# Altium PCB SD171-6.0PCB4.PcbDoc (part 10 of 11)
Units mil, origin at the board's own origin, x right, y up, seen from the top; angles counter-clockwise.
Board outline 5995 x 3921.26 mil, 6 copper layers (Top Layer, GND, Mid-Layer 1, Mid-Layer 2, VCC, Bottom Layer); 477 components, 539 nets, 2143 pads, 1050 vias.
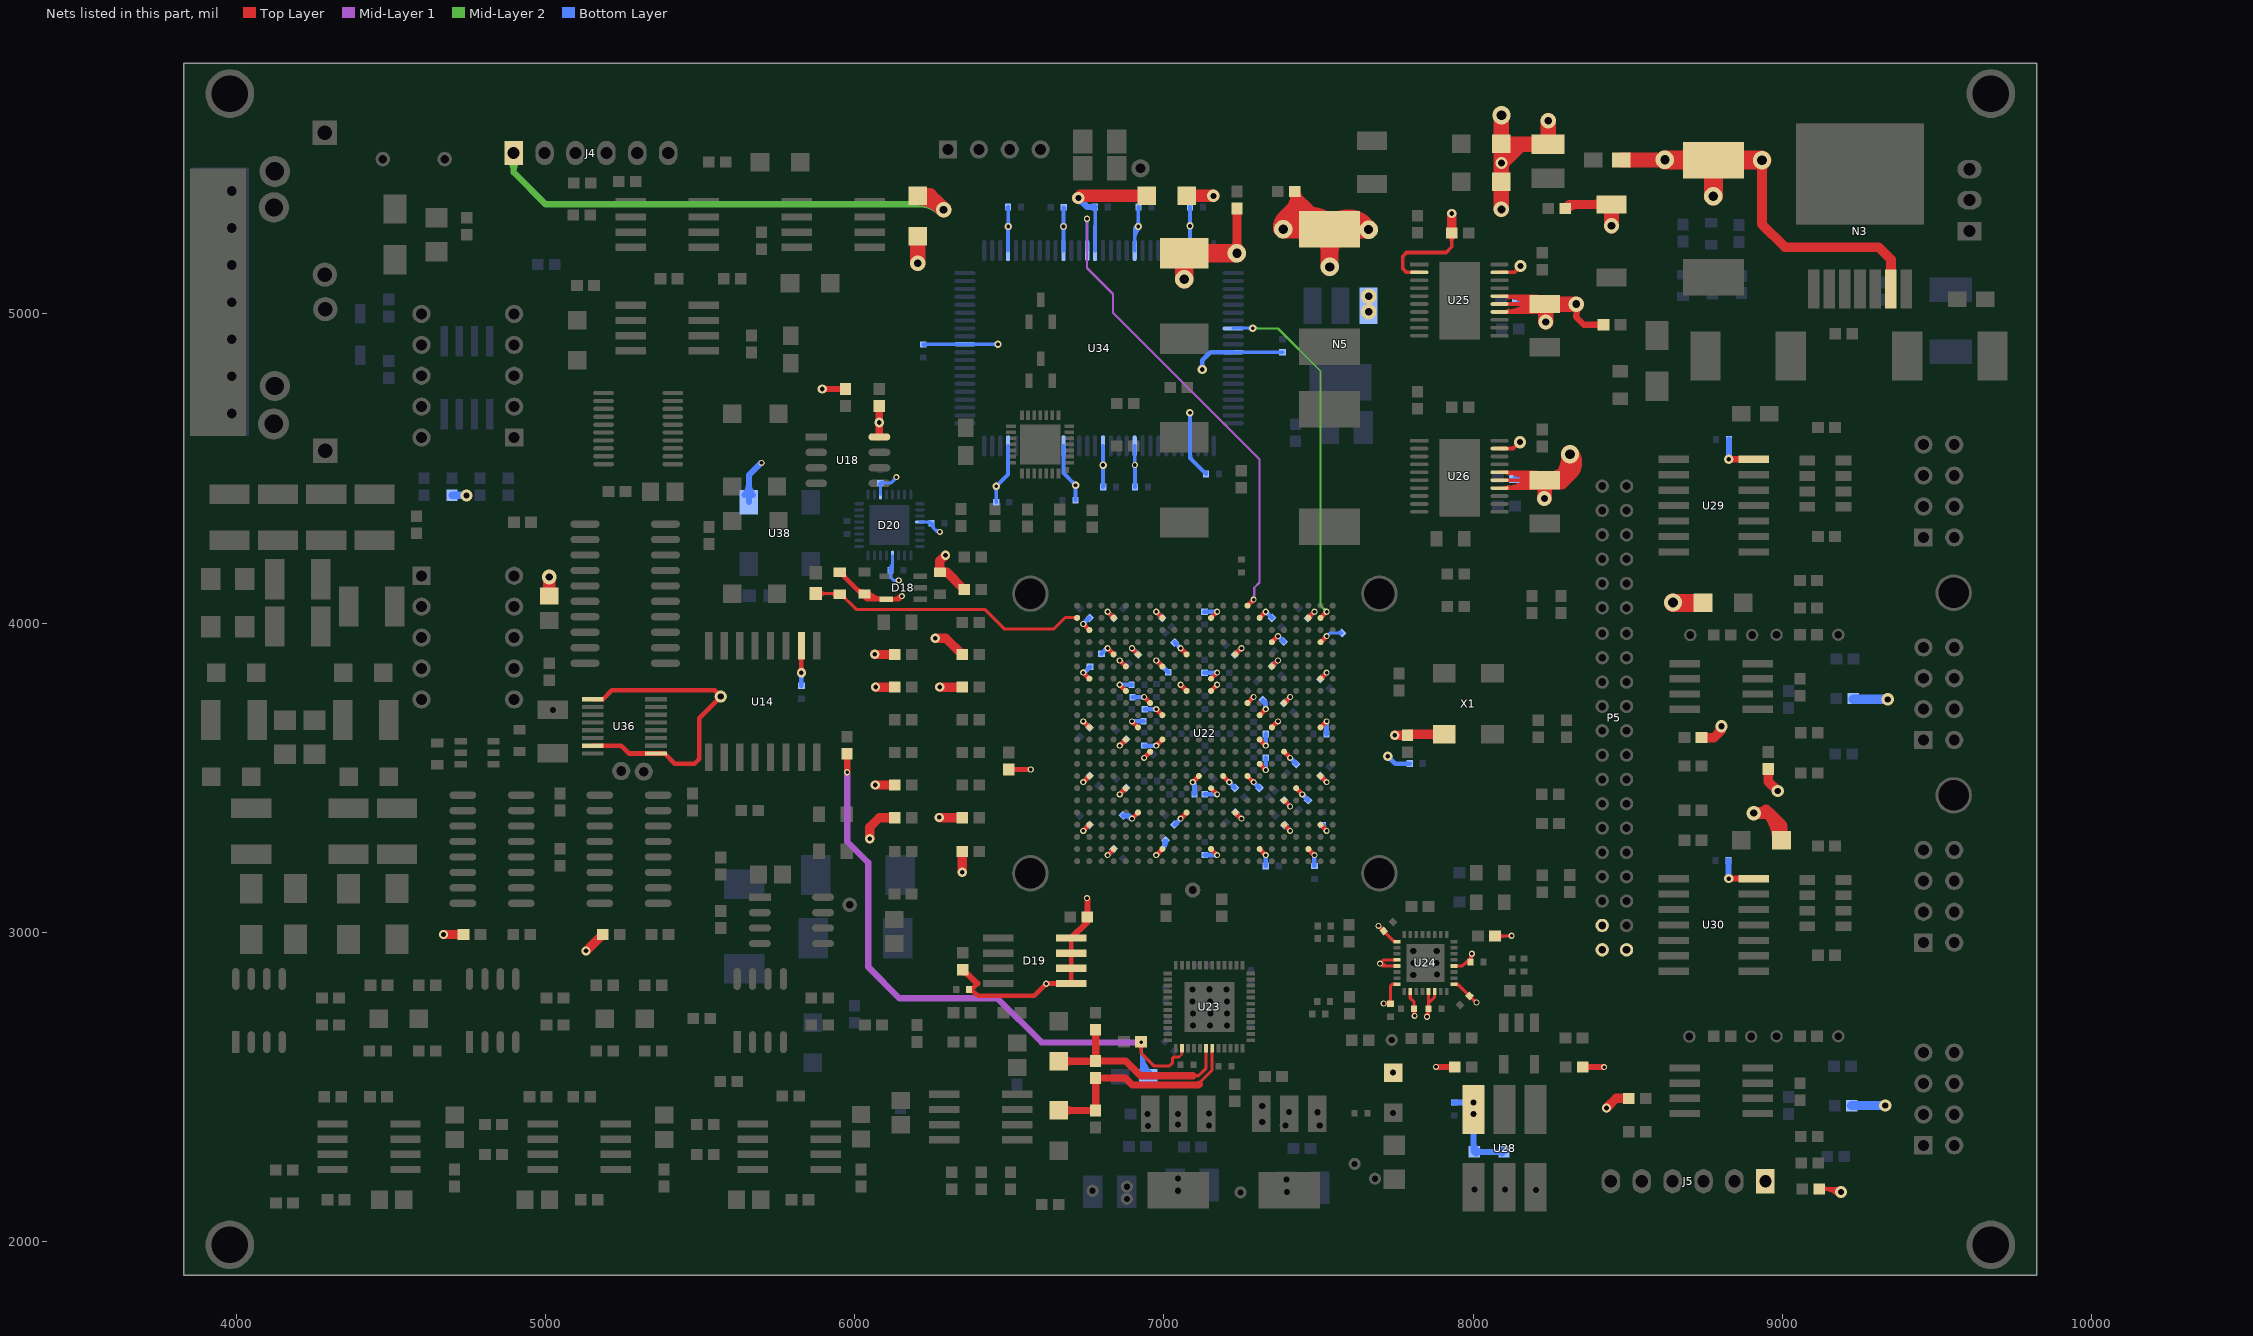
[diagram p14: the nets of this part, all layers, seen from the top]

## Via types
v1: diameter 19.68, hole 11.81, Top Layer to Bottom Layer, 521 vias
v2: diameter 50, hole 25, Top Layer to Bottom Layer, 162 vias
v3: diameter 30, hole 15, Top Layer to Bottom Layer, 100 vias
v4: diameter 39.37, hole 19.68, Top Layer to Bottom Layer, 74 vias
v5: diameter 31.5, hole 15.75, Top Layer to Bottom Layer, 44 vias
v6: diameter 40, hole 20, Top Layer to Bottom Layer, 38 vias
v7: diameter 24, hole 12, Top Layer to Bottom Layer, 33 vias
v8: diameter 47.24, hole 23.62, Top Layer to Bottom Layer, 24 vias
v9: diameter 59.06, hole 31.5, Top Layer to Bottom Layer, 10 vias
v10: diameter 60, hole 30, Top Layer to Bottom Layer, 9 vias
v11: diameter 25.98, hole 12.99, Top Layer to Bottom Layer, tented top, 9 vias
v12: diameter 23.62, hole 11.81, Top Layer to Bottom Layer, 8 vias
v13: diameter 20, hole 12, Top Layer to Bottom Layer, 6 vias
v14: diameter 50, hole 27.56, Top Layer to Bottom Layer, 4 vias
v15: diameter 51.18, hole 27.56, Top Layer to Bottom Layer, 2 vias
v16: diameter 39.37, hole 23.62, Top Layer to Bottom Layer, 2 vias
v17: diameter 80, hole 40, Top Layer to Bottom Layer, 1 vias
v18: diameter 47.24, hole 19.68, Top Layer to Bottom Layer, 1 vias
v19: diameter 47.24, hole 27.56, Top Layer to Bottom Layer, 1 vias
v20: diameter 22.05, hole 11.81, Top Layer to Bottom Layer, 1 vias

## Nets (pads, with @x,y where several pads share a name; then routed paths per layer and width w, separated by ;. In a path a pad name is that pad's centre, name@x,y a point inside that pad or via, vN(x,y) a via of type N, cw(c..) or ccw(c..) an arc to the next point about the centre after c; other vN are vias at no path point) (continued)
VCC3V3: C43.1 C54.1 C58.1 C65.2 C74.1 C110.2 C121.2 C122.2 C123.2 C124.2 C125.2 C126.2 C128.2 C129.2 C130.2 C131.2 C132.2 C133.2 C134.2 C135.2 C136.2 C139.2 C140.2 C141.2 C143.2 C144.2 C147.2 C148.2 C155.2 C160.2 C161.2 C162.2 C168.2 C169.2 C170.2 C176.2 C177.2 C180.2 C181.2 C182.2 C183.2 C184.2 C185.2 C186.2 C187.2 C188.2 C189.2 C190.2 C191.2 C192.2 C193.2 C194.2 C195.2 C196.2 C197.2 C198.2 C199.2 C200.2 C204.2 C205.2 C206.2 C207.2 C208.2 C209.2 C210.2 C211.2 C215.1 C216.2 C223.2 C224.2 C225.2 C226.2 D18.5 D19.5 D19.6 D19.7 D19.8 D20.4 D20.12 D20.27 J4.1 J5.1 L10.2 L22.2 L26.2 L27.1 L29.2 L33.1 L34.1 N5.3 P5.1 P5.2 P5.3 pad.0@5566,3762 pad.0@7741,2545 pad.0@8001,2412 pad.0@8001,2449 R23.1 R33.1 R44.2 R47.2 R48.2 R51.2 R55.2 R60.2 R67.1 R68.2 R70.1 R71.1 R92.1 R102.2 R103.2 R105.2 R107.2 R108.2 R117.2 R127.1 R130.1 R136.2 R137.1 R138.1 R143.1 R149.2 R150.2 U14.2 U18.8 U22.AA3 U22.AA7 U22.AA11 U22.AA15 U22.AA19 U22.B4 U22.B7 U22.B11 U22.B15 U22.B19 U22.C2 U22.C21 U22.D16 U22.E9 U22.E13 U22.E17 U22.E19 U22.F4 U22.F6 U22.F11 U22.G2 U22.G10 U22.G12 U22.G14 U22.G21 U22.H9 U22.H15 U22.J5 U22.J18 U22.K15 U22.L2 U22.L7 U22.L8 U22.L16 U22.L21 U22.M15 U22.N5 U22.N8 U22.N18 U22.R2 U22.R6 U22.R10 U22.R12 U22.R21 U22.T9 U22.T13 U22.U5 U22.U11 U22.U18 U22.V6 U22.V8 U22.V12 U22.V16 U22.W2 U22.W5 U22.W21 U24.1 U24.4 U24.17 U24.20 U24.21 U24.24 U24.26 U24.29 U24.30 U25.2 U28.6 U29.14 U30.14 U36.1 U36.7 U36.9 U38.4 X1.4 | length 18306.8
  Top Layer w10: v1@7694,3015.16 cw(c7694,3003.47) 7702.27,3011.73 cw(c7710.53,3020) v1@7698.84,3020 ; v1(7694,3020) C206.2@7711.15,3002.9 ; v1@7698,2898 v1(7699,2898) ; 7701.82,3012.18 ccw(c7710.44,3020.79) C206.2@7710.44,3008.61 ; 7701.94,3012.06 cw(c7693.48,3003.61) C206.2@7705.44,3003.61 ; v1@7702.42,2901.42 ccw(c7729.18,2928.18) 7729.18,2890.34 ; v1(7711,2769) 7710,2769 7710.78,2768.22 C200.2@7733.14,2768.22 7733.14,2825.86 7733,2826 7738.24,2831.24 U24.24@7754.44,2831.24 ; C206.2@7711.15,3002.9 7745.01,2969.04 U24.17@7754.44,2969.04 ; C206.2@7711.85,2997.19 cw(c7711.85,2985.12) 7720.39,2993.66 cw(c7728.93,3002.19) C206.2@7716.85,3002.19 ; v1@7714.42,2772.42 ccw(c7724.57,2782.57) C200.2@7724.57,2768.22 ; C200.2@7728.6,2764.69 ccw(c7720.07,2756.15) 7720.07,2768.22 ccw(c7720.07,2780.29) C200.2@7728.6,2771.76 ; C200.2@7729.6,2771.76 ccw(c7721.07,2780.29) 7733.14,2780.29 ccw(c7745.21,2780.29) C200.2@7736.67,2771.76 ; 7732.9,2825.9 cw(c7744.79,2814) U24.24@7748.72,2830.36 ; 7740.68,2973.36 ccw(c7748.93,2981.61) U24.17@7748.93,2969.95 ; U24.21@7754.44,2890.34 7706.66,2890.34 v1(7699,2898) ; U24.20@7754.44,2909.94 7711.06,2909.94 7711,2910 v1(7699,2898) ; U24.26@7796.94,2808.44 7796.94,2786.06 7809.3,2773.7 C199.2@7809.3,2751.98 7809.3,2728.3 7809,2728 7810,2728 v1(7811,2729) ; C199.2@7805.77,2747.45 cw(c7797.23,2738.91) 7809.3,2738.91 cw(c7821.37,2738.91) C199.2@7812.84,2747.45 ; C199.2@7805.77,2756.52 ccw(c7797.23,2765.05) 7809.3,2765.05 ccw(c7821.37,2765.05) C199.2@7812.84,2756.52 ; C199.2@7809.3,2744.79 ccw(c7826.79,2744.79) v1@7814.42,2732.42 ; v1@7847.58,2729.42 ccw(c7827.96,2749.04) C208.2@7855.7,2749.04 ; v1(7851,2726) 7855,2730 7856,2730 7855.7,2730.3 C208.2@7855.7,2752.02 7855.94,2752.26 7855.94,2770 ; C208.2@7852.16,2747.48 cw(c7843.63,2738.95) 7855.7,2738.95 cw(c7867.77,2738.95) C208.2@7859.23,2747.48 ; C208.2@7852.16,2756.55 ccw(c7843.04,2765.67) 7855.94,2765.67 ; 7855.94,2764.5 ccw(c7867.18,2764.5) C208.2@7859.23,2756.55 ; U24.29@7855.94,2808.44 7855.94,2770 ; U24.30@7875.64,2808.44 7875.64,2789.7 7855.94,2770 ; U24.1@7937.84,2831.24 7950.58,2831.24 C205.2@7987.92,2793.9 8008.82,2773 8010,2773 v1(8011,2772) ; U24.4@7937.84,2890.34 7965.34,2890.34 7978.02,2903.02 C198.2@7991.7,2903.02 7991.7,2925.7 v1(7996,2930) ; U24.1@7943.35,2830.34 cw(c7943.35,2810.7) 7957.24,2824.59 ; U24.1@7943.6,2830.37 cw(c7946.57,2820) 7954.19,2827.63 ; 7971.18,2896.18 cw(c7981.85,2885.5) C198.2@7989.25,2898.66 ; 7975.17,2900.17 cw(c7991.7,2883.64) C198.2@7991.7,2907.02 ; 7980.5,2905.5 cw(c7988.56,2897.44) C198.2@7994.15,2907.37 ; C205.2@7982.22,2794.61 ccw(c7970.15,2794.61) 7978.68,2803.14 ccw(c7987.22,2811.68) C205.2@7987.22,2799.61 ; C198.2@7988.16,2899.48 ccw(c7979.63,2890.95) 7979.63,2903.02 ccw(c7979.63,2915.09) C198.2@7988.16,2906.55 ; C198.2@7988.16,2907.55 ccw(c7979.63,2916.09) 7991.7,2916.09 ccw(c8003.77,2916.09) C198.2@7995.23,2907.55 ; C205.2@7988.63,2788.19 cw(c7988.63,2776.12) 7997.17,2784.66 cw(c8005.7,2793.19) C205.2@7993.63,2793.19 ; C198.2@7991.7,2907.93 cw(c8018.07,2907.93) v1@7999.42,2926.58 ; 8000.72,2781.1 ccw(c8011,2791.38) v1@8011,2776.84 ; R92.1@8071,2987 8124,2987 v1(8125,2988) ; R92.1@8081.19,2977.81 cw(c8103.38,2955.62) 8103.38,2987 cw(c8103.38,3018.38) R92.1@8081.19,2996.19 ; 8110.9,2987 ccw(c8110.9,3002.11) v1@8121.58,2991.42
  Top Layer w12: U25.2@7826,5134.41 7784.59,5134.41 7773,5146 7773,5187 7785,5199 7913,5199 7931,5217 C74.1@7931,5262 ; 7931,5233.03 ccw(c7902.03,5233.03) 7922.51,5253.51 cw(c7902.03,5233.03) 7931,5233.03 ; 7931,5233.03 cw(c7959.97,5233.03) 7939.49,5253.51 ccw(c7959.97,5233.03) 7931,5233.03
  Top Layer w15: U36.7@5152,3603 5244,3603 5269,3578 U36.9@5356.72,3578 5384,3578 5417,3545 5481,3545 5496,3560 5496,3692 pad.0@5566,3762 5546,3782 5214,3782 5185,3753 U36.1@5152,3753 ; v3(5827,3839) U14.2@5827,3926 ; R150.2@5951,4163.87 6038.52,4076.35 D18.5@6101.66,4076.35 6141.35,4076.35 v1(6152,4087) ; R150.2@5963.19,4163.87 ccw(c5992.6,4163.87) 5971.8,4143.06 ; 6003.98,4110.88 ccw(c6026.31,4133.22) C223.2@6026.31,4101.63 ; C223.2@6030.38,4088.83 ccw(c6060.52,4118.97) 6060.52,4076.35 ; C223.2@6040.99,4099.44 ccw(c6096.73,4155.18) D18.5@6096.73,4076.35 ; D18.5@6120.62,4076.35 ccw(c6120.62,4118.38) v1@6150.34,4088.66 ; R149.2@6275,4163.87 6298.13,4163.87 ; 6396,2833 6376.98,2813.98 6396.97,2794 6580,2794 v13(6619,2833) 6619.48,2833.48 D19.5@6700.62,2833.48 D19.6@6700.62,2882.69 ; R143.1@6498,3526 v1(6569,3526) ; R143.1@6505.42,3518.58 cw(c6523.35,3500.65) 6523.35,3526 cw(c6523.35,3551.35) R143.1@6505.42,3533.42 ; D19.8@6700.62,2981.12 D19.7@6700.62,2931.91 ; v1(6738.91,3327.65) U22.AA19@6758.6,3347.34 ; v1(6738.91,3485.13) U22.AA15@6758.6,3504.82 ; v1(6738.91,3681.99) U22.AA11@6758.6,3662.3 ; v1(6738.91,3839.47) U22.AA7@6758.6,3819.78 ; v1(6738.91,3996.95) U22.AA3@6758.6,3977.26 ; v1(6817.65,3248.91) U22.W21@6837.34,3268.6 ; v1(6817.65,3918.21) U22.W5@6837.34,3898.52 ; v1(6817.65,4036.32) U22.W2@6837.34,4016.63 ; v1(6857.02,3445.76) U22.V16@6876.71,3465.45 ; v1(6857.02,3603.24) U22.V12@6876.71,3622.93 ; v1(6857.02,3800.1) U22.V8@6876.71,3780.41 ; v1(6857.02,3878.84) U22.V6@6876.71,3859.15 ; v1(6896.39,3367.02) U22.U18@6916.08,3386.71 ; v1(6896.39,3681.99) U22.U11@6916.08,3662.3 ; v1(6896.39,3918.21) U22.U5@6916.08,3898.52 ; v1(6935.76,3563.87) U22.T13@6955.45,3583.56 ; v1(6935.76,3760.73) U22.T9@6955.45,3741.04 ; v1(6975.13,3248.91) U22.R21@6994.82,3268.6 ; v1(6975.13,3603.24) U22.R12@6994.82,3622.93 ; v1(6975.13,3721.36) U22.R10@6994.82,3701.67 ; v1(6975.13,3878.84) U22.R6@6994.82,3859.15 ; v1(6975.13,4036.32) U22.R2@6994.82,4016.63 ; v1(7053.87,3367.02) U22.N18@7073.56,3386.71 ; v1(7053.87,3800.1) U22.N8@7073.56,3780.41 ; v1(7053.87,3918.21) U22.N5@7073.56,3898.52 ; v1(7093.24,3485.13) U22.M15@7112.93,3504.82 ; U22.L21@7152.3,3268.6 v1(7171.99,3248.91) ; U22.L16@7152.3,3465.45 v1(7171.99,3445.76) ; U22.L8@7152.3,3780.41 v1(7171.99,3800.1) ; U22.L7@7152.3,3819.78 v1(7171.99,3839.47) ; U22.L2@7152.3,4016.63 v1(7171.99,4036.32) ; U22.K15@7191.67,3504.82 v1(7211.36,3485.13) ; U22.J18@7231.04,3386.71 v1(7250.73,3367.02) ; U22.J5@7231.04,3898.52 v1(7250.73,3918.21) ; U22.H15@7270.41,3504.82 v1(7290.1,3485.13) ; U22.H9@7270.41,3741.04 v1(7290.1,3760.73) ; U22.G21@7309.78,3268.6 v1(7329.47,3248.91) ; U22.G14@7309.78,3544.19 v1(7329.47,3524.5) ; U22.G12@7309.78,3622.93 v1(7329.47,3603.24) ; U22.G10@7309.78,3701.67 v1(7329.47,3721.36) ; U22.G2@7309.78,4016.63 v1(7329.47,4036.32) ; U22.F11@7349.15,3662.3 v1(7368.84,3681.99) ; U22.F6@7349.15,3859.15 v1(7368.84,3878.84) ; U22.F4@7349.15,3937.89 v1(7368.84,3957.58) ; U22.E19@7388.52,3347.34 v1(7408.21,3327.65) ; U22.E17@7388.52,3426.08 v1(7408.21,3406.39) ; U22.E13@7388.52,3583.56 v1(7408.21,3563.87) ; U22.E9@7388.52,3741.04 v1(7408.21,3760.73) ; U22.D16@7427.89,3465.45 v1(7447.58,3445.76) ; U22.C21@7467.26,3268.6 v1(7486.95,3248.91) ; U22.C2@7467.26,4016.63 v1(7486.95,4036.32) ; U22.B19@7506.63,3347.34 v1(7526.32,3327.65) ; U22.B15@7506.63,3504.82 v1(7526.32,3485.13) ; U22.B11@7506.63,3662.3 v1(7526.32,3681.99) ; U22.B7@7506.63,3819.78 v1(7526.32,3839.47) ; U22.B4@7506.63,3937.89 v1(7526.32,3957.58) ; v3@5821.7,3844.3 ccw(c5808.89,3857.11) 5827,3857.11 ; v3@5821.7,3844.3 ccw(c5808.89,3857.11) 5827,3857.11 ; v3@5821.7,3844.3 ccw(c5808.89,3857.11) 5827,3857.11 ; 5827,3857.11 ccw(c5845.11,3857.11) v3@5832.3,3844.3 ; 5827,3857.11 ccw(c5845.11,3857.11) v3@5832.3,3844.3 ; 5827,3857.11 ccw(c5845.11,3857.11) v3@5832.3,3844.3 ; D19.6@6700.62,2882.69 D19.7@6700.62,2931.91 ; D19.6@6700.62,2882.69 D19.7@6700.62,2931.91
  Top Layer w19.68: R137.1@6349,2868.84 cw(c6349,2841.91) 6368.05,2860.95 ; R137.1@6349,2878 6351,2878 6396,2833 ; D19.8@6700.62,2981.12 6752,3032.5 R138.1@6752,3049 6752,3109 v1(6751,3110) ; R138.1@6746.23,3054.77 ccw(c6732.31,3068.69) 6752,3068.69 ccw(c6771.69,3068.69) R138.1@6757.77,3054.77 ; v1(7880,2564) 7880,2563 R103.2@7941,2563 ; R103.2@7934.23,2557.23 ccw(c7920.31,2543.31) 7920.31,2563 ccw(c7920.31,2582.69) R103.2@7934.23,2568.77 ; R102.2@8355,2563 v1(8424,2563) ; R102.2@8361.77,2557.23 cw(c8375.69,2543.31) 8375.69,2563 cw(c8375.69,2582.69) R102.2@8361.77,2568.77
  Top Layer w20: v3(5894,4757) R44.2@5970,4757 ; v3(8827,3173) U30.14@8908.84,3173 ; v3(8827,4530) U29.14@8908.84,4530 ; 5950.69,4757 ccw(c5950.69,4776.31) 5964.34,4762.66 cw(c5950.69,4776.31) 5950.69,4757 ; 5950.69,4757 cw(c5950.69,4737.69) 5964.34,4751.34 ccw(c5950.69,4737.69) 5950.69,4757
  Top Layer w23.62: C43.1@6079,4702 6079,4602.25 U18.8@6079.25,4602
  Top Layer w30: v3(4669,2992) R23.1@4734,2992 ; v3(5130,2939) 5131,2939 R33.1@5184,2992 ; v3(6048,3302) 6048,3339 6079,3370 R55.2@6129,3370 ; v3(6064,3899) 6065,3898 R47.2@6129,3898 ; v3(6066,3476) R51.2@6129,3476 ; v3(6067,3793) 6067.5,3792.5 R48.2@6129,3792.5 ; v3(6260,3951) 6294,3951 R67.1@6347,3898 ; v3(6273,3371) 6274,3370 R70.1@6347,3370 ; v3(6275,3793) 6275.5,3792.5 R68.2@6347,3792.5 ; R149.2@6275,4163.87 6275,4201 v3(6293,4219) ; 6298.13,4163.87 R60.2@6354,4108 ; v3(6347,3194) R71.1@6347,3261 ; v10(7236,5196) C58.1@7236,5341 ; L27.1@7446,5274 7504,5274 L27.1@7536,5274 ; C74.1@7931,5262 v3(7931,5325) ; v3(8432,2431) 8463,2462 R107.2@8504,2462 ; R108.2@8739,3629 8780,3629 8804,3653 v4(8804,3666) ; 7236,5232.21 cw(c7199.79,5232.21) 7225.39,5206.61 ccw(c7199.79,5232.21) 7236,5232.21 ; 7236,5232.21 ccw(c7272.21,5232.21) 7246.61,5206.61 cw(c7272.21,5232.21) 7236,5232.21 ; 8786.81,3635.81 ccw(c8756.62,3666) 8799.32,3666 cw(c8756.62,3666) 8786.81,3635.81
  Top Layer w31.5: v10@7385.13,5276.63 cw(c7454.96,5206.81) L27.1@7507,5290.73 ; v10(7386,5274) v10@7386,5277.5 ; 7413.23,5304.73 cw(c7476.47,5241.49) L27.1@7523.6,5317.5 ; 7419.32,5358.68 cw(c7337.18,5276.54) L27.1@7453.33,5274.69 ; C65.2@7423,5396 C65.2@7423,5387 ; 7453.34,5356.66 cw(c7376.96,5280.27) L27.1@7484.84,5274.62 ; L27.1@7453.38,5276.16 ccw(c7349.37,5281.36) 7423,5355 ; L27.1@7454.22,5282.75 ccw(c7341.94,5305.93) C65.2@7423,5387 ; L27.1@7454.59,5284.41 ccw(c7399.25,5298.12) 7439.57,5338.43 ccw(c7490.91,5389.77) L27.1@7494.49,5317.25 ; L27.1@7455.22,5286.68 ccw(c7409.27,5300.76) 7443.25,5334.75 ; 7464.31,5345.69 cw(c7410.42,5291.79) L27.1@7485.06,5276.39 ; L27.1@7492.45,5317.1 cw(c7486.54,5378.03) 7443.25,5334.75 ; L27.1@7504,5274 7483.75,5294.25 7443.25,5294.25 7443.25,5334.75 ; L27.1@7536,5274 C65.2@7423,5387 ; v3(7747,3637) C215.1@7788,3637 7791,3640 X1.4@7907,3640 X1.4@7904,3637 ; X1.4@7889.92,3629.92 ccw(c7865.59,3605.59) 7865.59,3640 ccw(c7865.59,3674.41) X1.4@7889.92,3650.08 ; v10@7386,5277.5 7386,5318 7423,5355 ; v10@7386,5277.5 7443.25,5334.75 ; 7386,5308.41 cw(c7351.59,5308.41) 7375.92,5284.08 ccw(c7351.59,5308.41) 7386,5308.41 ; 7386,5308.41 ccw(c7420.41,5308.41) 7396.08,5284.08 cw(c7420.41,5308.41) 7386,5308.41 ; 7423,5355 ccw(c7483.21,5294.78) 7399.94,5276.98 cw(c7483.21,5294.78) 7423,5355 ; 7423,5355 7443.25,5334.75 ; 7423,5355 C65.2@7423,5387 ; v10@7369.14,5270.4 cw(c7415.72,5280.35) 7382.04,5314.04 ccw(c7415.72,5280.35) v10@7369.14,5270.4 ; v10@7400.25,5274 cw(c7443.11,5274) 7412.8,5304.3 ccw(c7443.11,5274) v10@7400.25,5274 ; C65.2@7426.25,5396 ccw(c7455.83,5396) 7434.92,5375.08 cw(c7455.83,5396) C65.2@7426.25,5396 ; 7435.28,5342.72 ccw(c7496.63,5404.07) 7496.63,5317.31 cw(c7496.63,5404.07) 7435.28,5342.72
  Top Layer w39.37: L10.2@5011,4087.37 v8(5011,4149) ; v8(8908,3385) 8956,3385 ; 8947.86,3393.14 cw(c8851.73,3297) L34.1@8987.68,3297 ; L34.1@8987.72,3297.9 ccw(c8878.42,3307.42) 8956,3385 ; L34.1@8998,3297 8998,3343 8956,3385
  Top Layer w40: L26.2@7074,5382 v6(7160,5382)
  Top Layer w50: L22.2@6203,5377 cw(c6203,5270.77) v2@6278.11,5345.89 ; L22.2@6203,5382 6242,5382 v2(6287,5337) ; L22.2@6204.39,5377.2 cw(c6220.5,5321.51) 6261.5,5362.5
  Top Layer w59.06: v10(7386,5274) L27.1@7446,5274 ; v10(7536,5152) L27.1@7536,5274 7661,5274 v10(7662,5273) ; L27.1@7561.38,5300 cw(c7596.01,5235.66) v10@7647.67,5287.33 ; L27.1@7561.67,5300.15 cw(c7595.88,5234.85) v10@7648.02,5286.98 ; v9(8647,4066) 8648,4065 L33.1@8744,4065 ; 7425.34,5274 ccw(c7425.34,5345.29) 7475.75,5294.88 cw(c7425.34,5345.29) 7425.34,5274 ; 7425.34,5274 cw(c7425.34,5202.71) 7475.75,5253.12 ccw(c7425.34,5202.71) 7425.34,5274 ; 7536,5202.71 ccw(c7464.71,5202.71) 7515.12,5253.12 cw(c7464.71,5202.71) 7536,5202.71 ; 7536,5202.71 cw(c7607.29,5202.71) 7556.88,5253.12 ccw(c7607.29,5202.71) 7536,5202.71 ; v10@7646.66,5274 ccw(c7646.66,5202.71) 7596.25,5253.12 cw(c7646.66,5202.71) v10@7646.66,5274 ; v10@7646.66,5274 cw(c7646.66,5345.29) 7596.25,5294.88 ccw(c7646.66,5345.29) v10@7646.66,5274
  Top Layer w60: v10(7066,5112) C54.1@7066,5195.8 7235.8,5195.8 v10(7236,5196)
  Mid-Layer 2 w20: J4.1@4881.76,5496.95 cw(c4847.61,5462.81) 4895.9,5462.81 cw(c4944.18,5462.81) J4.1@4910.04,5496.95 ; J4.1@4895.9,5520.46 4895.9,5458.1 4999,5355 6269,5355 v2(6287,5337) ; 6207.33,5355 cw(c6207.33,5257.33) v2@6276.39,5326.39 ; 6255.62,5355 cw(c6255.62,5305.62) v2@6290.54,5340.54
  Bottom Layer w10: C224.2@6078.48,4449.16 cw(c6068.85,4439.53) 6082.47,4439.53 ; D20.27@6082.47,4415.43 6082.47,4452.24 C224.2@6082.02,4452.7 6115.7,4452.7 6135,4472 v1(6134,4472) ; 6082.47,4441.73 cw(c6092.99,4441.73) C224.2@6085.55,4449.16 ; C224.2@6086.55,4449.16 cw(c6095.09,4440.63) 6095.09,4452.7 cw(c6095.09,4464.77) C224.2@6086.55,4456.23 ; C226.2@6112.16,4166.45 cw(c6103.63,4157.91) 6115.7,4157.91 cw(c6127.77,4157.91) C226.2@6119.23,4166.45 ; C226.2@6112.16,4175.52 ccw(c6088.8,4198.89) 6121.84,4198.89 ; D20.12@6121.84,4218.57 6121.84,4177.13 C226.2@6115.7,4170.98 6115.7,4147.3 6125,4138 v1(6142,4138) ; 6125.03,4462.03 ccw(c6115.05,4472) v1@6129.16,4472 ; 6127.44,4464.44 cw(c6134,4457.88) v1@6134,4467.16 ; v1@6138.58,4134.58 ccw(c6130.31,4126.31) 6130.31,4138 ccw(c6130.31,4149.69) v1@6138.58,4141.42 ; D20.4@6210.43,4326.84 6243.84,4326.84 6251,4319.68 6251,4310 6264,4297 6273,4297 v1(6275,4295) ; 6228.72,4326.84 cw(c6228.72,4305.01) C225.2@6244.16,4320.45 ; C225.2@6252.67,4321.41 ccw(c6276.93,4318.61) 6259.66,4301.34 ; 6255.5,4305.5 ccw(c6270.23,4320.23) v1@6274.1,4299.76 ; v1(6975.13,3248.91) 7005.5,3279.28 C148.2@7005.5,3296.47 ; C148.2@7001.26,3292.23 cw(c6991.02,3281.99) 7005.5,3281.99 ; C148.2@7005.5,3285.4 cw(c7015.16,3285.4) C148.2@7008.33,3292.23 ; v1(7526.32,3957.58) 7536.24,3967.5 C204.2@7575.47,3967.5 ; 6983.4,3257.18 cw(c6975.13,3265.45) 6975.13,3253.75 ccw(c6975.13,3265.45) 6983.4,3257.18 ; 6983.4,3257.18 ccw(c6991.67,3248.91) 6979.97,3248.91 cw(c6991.67,3248.91) 6983.4,3257.18 ; 7534.58,3965.84 cw(c7526.32,3974.11) 7526.32,3962.42 ccw(c7526.32,3974.11) 7534.58,3965.84 ; 7534.58,3965.84 ccw(c7542.85,3957.58) 7531.16,3957.58 cw(c7542.85,3957.58) 7534.58,3965.84 ; 6984.1,3257.88 ccw(c6946.22,3295.77) 6999.8,3295.77 cw(c6946.22,3295.77) 6984.1,3257.88 ; 7001.17,3274.95 ccw(c6980.36,3295.77) 7009.8,3295.77 cw(c6980.36,3295.77) 7001.17,3274.95 ; 7560.99,3967.5 ccw(c7560.99,3981.98) 7571.23,3971.74 cw(c7560.99,3981.98) 7560.99,3967.5 ; C204.2@7564.4,3967.5 cw(c7564.4,3957.84) 7571.23,3964.67 ccw(c7564.4,3957.84) C204.2@7564.4,3967.5
  Bottom Layer w15: C110.2@5826.98,3796.7 v3(5827,3839) ; v1(6738.91,3327.65) 6757.79,3346.53 C126.2@6758.5,3346.53 ; v1(6738.91,3485.13) 6739.16,3485.13 C125.2@6758.5,3504.47 ; v1(6738.91,3839.47) 6742.18,3839.47 C123.2@6761.02,3858.3 ; v1(6738.91,3996.95) C121.2@6758.5,4016.53 ; v1@6738.99,3681.99 v1(6738.91,3681.99) 6758.4,3662.5 C124.2@6758.47,3662.5 ; C122.2@6797.98,3900.7 6815.49,3918.21 v1(6817.65,3918.21) ; v1(6817.65,3248.91) 6817.94,3248.91 C136.2@6837.5,3268.47 ; v1(6817.65,4036.32) v1(6817.65,4036.32) C128.2@6837.53,4016.5 ; v1(6857.02,3445.76) 6876.5,3465.24 C134.2@6876.5,3465.53 ; v1(6857.02,3603.24) 6857.22,3603.24 C133.2@6876.5,3622.53 ; v1(6857.02,3800.1) 6895.19,3800.1 C131.2@6895.3,3799.98 ; C135.2@6867.47,3377.5 6885.92,3377.5 v1(6896.39,3367.02) ccw(c6876.26,3346.89) C135.2@6868.83,3374.38 ; v1(6896.39,3681.99) C143.2@6934.3,3681.98 ; v1(6896.39,3918.21) 6896.77,3918.21 C129.2@6916.47,3898.5 ; C130.2@6898.7,3760.02 6935.05,3760.02 v1(6935.76,3760.73) ; C144.2@6936.02,3603.3 6975.07,3603.3 v1(6975.13,3603.24) ; C132.2@6937.7,3721.02 6938.04,3721.36 v1(6975.13,3721.36) ; v1(6975.13,3878.84) 6975.85,3878.84 C141.2@7013.98,3840.7 ; v1(6975.13,4036.32) 6975.13,4035.84 C140.2@6994.5,4016.47 ; C147.2@7034.5,3347.53 7053.87,3366.9 v1(7053.87,3367.02) ; C139.2@7034.5,3937.53 7053.82,3918.21 v1(7053.87,3918.21) ; v1(7093.24,3485.13) 7098.7,3479.68 C155.2@7098.7,3446.02 ; C162.2@7131.02,3839.3 7131.18,3839.47 v1(7171.99,3839.47) ; C160.2@7131.02,4036.7 7131.4,4036.32 v1(7171.99,4036.32) ; C170.2@7132.02,3249.3 7171.6,3249.3 v1(7171.99,3248.91) ; C169.2@7131.98,3445.7 v1@7171.92,3445.7 ; v1(7211.36,3485.13) 7211.36,3484.62 C177.2@7229.5,3466.47 ; C161.2@7230.5,3898.53 7231.05,3898.53 v1(7250.73,3918.21) ; C168.2@7231.47,3386.5 7250.73,3367.25 v1(7250.73,3367.02) ; v1(7290.1,3485.13) 7290.1,3484.88 C176.2@7308.5,3466.47 ; C183.2@7320.53,3750.5 7329.47,3741.56 v1(7329.47,3721.36) ; C190.2@7329.3,3214.02 7329.3,3248.75 v1(7329.47,3248.91) ; C186.2@7329.3,3563.98 7329.3,3524.67 v1(7329.47,3524.5) ; C185.2@7329.3,3640.98 7329.3,3603.41 v1(7329.47,3603.24) ; v1(7329.47,4036.32) 7329.66,4036.32 C180.2@7349.5,4016.47 ; C181.2@7349.5,3860.47 7350.47,3860.47 v1(7368.84,3878.84) ; v1(7368.84,3957.58) 7369.4,3957.58 C182.2@7387.47,3939.5 ; C187.2@7388.5,3426.53 7388.5,3426.1 v1(7408.21,3406.39) ; C184.2@7388.5,3741.47 7388.95,3741.47 v1(7408.21,3760.73) ; C189.2@7390.5,3346.53 7390.5,3345.36 v1(7408.21,3327.65) ; v1(7408.21,3563.87) 7427.47,3544.61 C188.2@7427.47,3544.5 ; v1(7447.58,3445.76) 7466.47,3426.86 C195.2@7466.47,3426.5 ; C191.2@7466.5,4016.53 7467.16,4016.53 v1(7486.95,4036.32) ; C197.2@7486.7,3214.02 7486.7,3248.67 v1(7486.95,3248.91) ; C192.2@7506.5,3819.47 7506.5,3819.65 v1(7526.32,3839.47) ; C194.2@7506.53,3504.5 7506.95,3504.5 v1(7526.32,3485.13) ; C196.2@7513.02,3346.3 7513.02,3340.95 v1(7526.32,3327.65) ; C193.2@7525.7,3640.98 7525.7,3681.37 v1(7526.32,3681.99) ; v3@7724,3561.5 cw(c7724,3543.39) 7736.8,3556.2 cw(c7749.61,3569) v3@7731.5,3569 ; v3(7724,3569) 7748.02,3544.98 C207.2@7795.3,3544.98 ; v3@5821.7,3833.7 cw(c5808.93,3820.93) 5826.98,3820.93 ; v3@5821.7,3833.7 cw(c5808.93,3820.93) 5826.98,3820.93 ; v3@5821.7,3833.7 cw(c5808.93,3820.93) 5826.98,3820.93 ; 5826.98,3820.85 cw(c5845.15,3820.85) v3@5832.3,3833.7 ; 5826.98,3820.85 cw(c5845.15,3820.85) v3@5832.3,3833.7 ; 5826.98,3820.85 cw(c5845.15,3820.85) v3@5832.3,3833.7 ; v1@6738.91,3841.81 ccw(c6738.91,3855.36) 6748.49,3845.78 ; v1@6738.91,3841.81 ccw(c6738.91,3855.36) 6748.49,3845.78 ; v1@6738.91,3841.81 ccw(c6738.91,3855.36) 6748.49,3845.78 ; C135.2@6867.47,3377.5 cw(c6867.48,3340.81) 6894.66,3365.45 ccw(c6867.48,3340.81) C135.2@6867.47,3377.5 ; v1@7091.59,3483.48 cw(c7074.42,3466.31) 7098.7,3466.31 ccw(c7074.42,3466.31) v1@7091.59,3483.48 ; C183.2@7319.47,3748.03 cw(c7295.32,3723.88) 7329.47,3723.88 ccw(c7295.32,3723.88) C183.2@7319.47,3748.03 ; C196.2@7516.52,3346.3 ccw(c7537.88,3346.3) 7522.77,3331.19 cw(c7537.88,3346.3) C196.2@7516.52,3346.3
  Bottom Layer w19.68: C209.2@7938.98,2448.7 7939.28,2449 pad.0@8001,2449 pad.0@8001,2412 8001,2292.02 R105.2@8004,2289.02 R136.2@8100,2289.02 ; pad.0@7994.04,2405.04 cw(c7977.24,2388.24) 8001,2388.24 cw(c8024.76,2388.24) pad.0@8007.96,2405.04 ; pad.0@7994.04,2418.96 ccw(c7977.24,2435.76) 8001,2435.76 ccw(c8024.76,2435.76) pad.0@8007.96,2418.96 ; pad.0@7994.04,2455.96 cw(c7977.24,2472.76) 7977.24,2449 cw(c7977.24,2425.24) 7994.04,2442.04 cw(c7977.24,2425.24) 8001,2425.24 cw(c8024.76,2425.24) pad.0@8007.96,2442.04 ; 8001,2316.95 ccw(c8030.94,2316.95) R105.2@8009.77,2295.78 ; R105.2@8009.77,2283.25 cw(c8023.69,2269.32) 8023.69,2289.02 cw(c8023.69,2308.71) R105.2@8009.77,2294.78 ; R136.2@8094.23,2283.25 ccw(c8080.31,2269.32) 8080.31,2289.02 ccw(c8080.31,2308.71) R136.2@8094.23,2294.78
  Bottom Layer w20: U38.4@5643.19,4414.65 ccw(c5609.86,4447.99) 5657,4447.99 ccw(c5704.14,4447.99) U38.4@5670.81,4414.65 ; U38.4@5657,4391 5657,4478 5697,4518 v1(5698,4518) ; C211.2@8826.7,3232.02 8826.7,3173.3 v3(8827,3173) ; v3(8827,4530) 8827.7,4530.7 C210.2@8827.7,4594.02
  Bottom Layer w23.62: R117.2@4696.77,4413 v4(4743,4413)
  Bottom Layer w30: R130.1@9225,2439 v6(9334,2439) ; R127.1@9230,3753 v6(9342,3753)
  Bottom Layer w39.37: pad.0@8000.7,2448.7 pad.0@8001,2449
  other v2: 7663,5007 7663,5057
  other v5: 6079,4649
VCC5V: C77.1 C79.1 C81.1 C82.1 C83.1 C84.1 L30.2 L31.2 L32.2 N3.6 R106.2 R109.1 R110.1 R153.1 R154.1 U25.14 U25.15 U25.16 U25.19 U26.14 U26.15 U26.16 U26.19 | length 8645.4
  Top Layer w12: U26.14@8085.84,4436.46 8206.36,4436.46 C81.1@8232,4462 ; U26.15@8085.84,4462.05 C81.1@8232,4462 ; U26.16@8085.84,4487.64 8206.36,4487.64 C81.1@8232,4462 ; U26.19@8085.84,4564.41 8129.41,4564.41 8151,4586 v4(8152,4585) ; U25.14@8085.84,5006.46 8206.36,5006.46 C79.1@8232,5032 ; U25.15@8085.84,5032.05 C79.1@8232,5032 ; U25.16@8085.84,5057.64 8206.36,5057.64 C79.1@8232,5032 ; U25.19@8085.84,5134.41 8118,5134.41 8133.41,5134.41 v4(8154,5155) ; U26.14@8109.39,4436.51 cw(c8118.09,4430.76) 8116,4440.98 ; U26.16@8109.39,4487.59 ccw(c8118.24,4493.43) 8116.11,4483.04 ; U25.14@8109.39,5006.51 cw(c8118.09,5000.76) 8116,5010.98 ; U25.16@8109.39,5057.59 ccw(c8118.24,5063.43) 8116.11,5053.04 ; C81.1@8232,4462 C81.1@8232,4462 ; C79.1@8232,5032 C79.1@8232,5032 ; R109.1@9120,2169 9180,2169 9190,2159 v4(9191,2159) ; R109.1@9129.49,2160.51 cw(c9149.97,2140.03) 9149.97,2169 cw(c9149.97,2197.97) R109.1@9129.49,2177.49 ; R109.1@9133.82,2169 cw(c9133.82,2101.82) v4@9181.32,2149.32 ; 9162.79,2169 cw(c9162.79,2130.79) v4@9189.81,2157.81 ; C81.1@8195.68,4445.36 ccw(c8155.4,4405.09) 8155.4,4462.05 cw(c8155.4,4405.09) C81.1@8195.68,4445.36 ; C81.1@8195.68,4445.36 ccw(c8093.62,4343.3) 8093.62,4487.64 cw(c8093.62,4343.3) C81.1@8195.68,4445.36 ; C81.1@8195.68,4478.64 cw(c8155.63,4518.69) 8155.63,4462.05 ccw(c8155.63,4518.69) C81.1@8195.68,4478.64 ; C81.1@8195.68,4478.64 cw(c8093.85,4580.47) 8093.85,4436.46 ccw(c8093.85,4580.47) C81.1@8195.68,4478.64 ; C79.1@8195.68,5015.36 ccw(c8155.4,4975.09) 8155.4,5032.05 cw(c8155.4,4975.09) C79.1@8195.68,5015.36 ; C79.1@8195.68,5015.36 ccw(c8093.62,4913.3) 8093.62,5057.64 cw(c8093.62,4913.3) C79.1@8195.68,5015.36 ; C79.1@8195.68,5048.64 cw(c8155.63,5088.69) 8155.63,5032.05 ccw(c8155.63,5088.69) C79.1@8195.68,5048.64 ; C79.1@8195.68,5048.64 cw(c8093.85,5150.47) 8093.85,5006.46 ccw(c8093.85,5150.47) C79.1@8195.68,5048.64 ; 8122.59,4487.64 cw(c8122.59,4372.28) 8204.16,4453.85 ccw(c8122.59,4372.28) 8122.59,4487.64 ; 8122.59,5057.64 cw(c8122.59,4942.28) 8204.16,5023.85 ccw(c8122.59,4942.28) 8122.59,5057.64 ; 8122.82,4436.46 ccw(c8122.82,4551.5) 8204.16,4470.15 cw(c8122.82,4551.5) 8122.82,4436.46 ; 8122.82,5006.46 ccw(c8122.82,5121.5) 8204.16,5040.15 cw(c8122.82,5121.5) 8122.82,5006.46 ; 8151.56,4487.64 cw(c8151.56,4401.25) 8212.65,4462.33 ccw(c8151.56,4401.25) 8151.56,4487.64 ; 8151.56,5057.64 cw(c8151.56,4971.25) 8212.65,5032.33 ccw(c8151.56,4971.25) 8151.56,5057.64 ; 8151.79,4436.46 ccw(c8151.79,4522.53) 8212.65,4461.67 cw(c8151.79,4522.53) 8151.79,4436.46 ; 8151.79,5006.46 ccw(c8151.79,5092.53) 8212.65,5031.67 cw(c8151.79,5092.53) 8151.79,5006.46 ; 8180.53,4487.64 cw(c8180.53,4430.22) 8221.13,4470.82 ccw(c8180.53,4430.22) 8180.53,4487.64 ; 8180.53,5057.64 cw(c8180.53,5000.22) 8221.13,5040.82 ccw(c8180.53,5000.22) 8180.53,5057.64 ; 8180.76,4436.46 ccw(c8180.76,4493.56) 8221.13,4453.18 cw(c8180.76,4493.56) 8180.76,4436.46 ; 8180.76,5006.46 ccw(c8180.76,5063.56) 8221.13,5023.18 cw(c8180.76,5063.56) 8180.76,5006.46
  Top Layer w20: 8334,4990 8359,4965 R106.2@8422,4965 ; 8334,4995.79 cw(c8370.21,4995.79) v2@8344.61,5021.39 ; 8401.69,4965 ccw(c8401.69,4984.31) 8415.34,4970.66 cw(c8401.69,4984.31) 8401.69,4965 ; 8401.69,4965 cw(c8401.69,4945.69) 8415.34,4959.34 ccw(c8401.69,4945.69) 8401.69,4965
  Top Layer w30: C82.1@8298,5341 8311.22,5354.22 C84.1@8448,5354.22 ; 8393.24,5354.22 ccw(c8393.24,5389.29) 8418.04,5364.49 cw(c8393.24,5389.29) 8393.24,5354.22 ; 8393.24,5354.22 cw(c8393.24,5319.15) 8418.04,5343.95 ccw(c8393.24,5319.15) 8393.24,5354.22 ; C82.1@8301.12,5338.88 cw(c8338.16,5301.84) 8338.16,5354.22 ccw(c8338.16,5301.84) C82.1@8301.12,5338.88
  Top Layer w31.5: v9@8925.26,5487.26 cw(c8901.73,5463.73) 8935,5463.73 cw(c8968.27,5463.73) v9@8944.74,5487.26 ; v9@8935,5498 v9(8935,5497) 8935,5290 9009,5216 9312,5216 9352,5176 N3.6@9352,5080.78 ; R110.1@8955,3528 8955,3487 v4(8986,3456)
  Top Layer w47.24: v8@8232,4404 C81.1@8232,4462
  Top Layer w50: v2(8092,5338) L31.2@8092,5427 v16(8092,5488.5) ; v9(8092,5643) L30.2@8092,5550 ; 8161,5549.12 8152.62,5549.12 ; v8(8235,4974) 8235,5029 C79.1@8232,5032 v2(8334,5032) ; v2(8243,5625) C77.1@8243,5549.12 8152.62,5549.12 ; v2(8448,5285) C84.1@8448,5354.22 ; C83.1@8479,5498 v10@8620,5498 ; v16(8092,5488.5) L30.2@8092,5550 ; v16(8092,5488.5) 8152.62,5549.12 ; L30.2@8092,5550 8092.88,5549.12 8152.62,5549.12
  Top Layer w59.06: C81.1@8232,4462 C81.1@8232,4462 8284.05,4462.05 ; 8311.05,4489.05 ccw(c8280.93,4519.16) v9(8314,4546) ; 8284.05,4462.05 ccw(c8210.49,4535.61) v9(8314,4546) ; 8284.05,4462.05 ccw(c8210.49,4535.61) v9(8314,4546) ; 8284.05,4462.05 8314,4492 v9(8314,4546) ; C81.1@8251.69,4462 ccw(c8251.69,4540.01) 8306.85,4484.85 cw(c8251.69,4540.01) C81.1@8251.69,4462
  Top Layer w60: v10(8621,5499) 8620,5498 L32.2@8778,5498 ; v9(8777,5381) 8778,5382 L32.2@8778,5498 ; v9@8935,5498 L32.2@8778,5498 ; 8668.48,5498 ccw(c8668.48,5568.15) 8718.08,5518.55 cw(c8668.48,5568.15) 8668.48,5498 ; 8668.48,5498 cw(c8668.48,5427.85) 8718.08,5477.45 ccw(c8668.48,5427.85) 8668.48,5498 ; 8778,5427.85 ccw(c8707.85,5427.85) 8757.45,5477.45 cw(c8707.85,5427.85) 8778,5427.85 ; 8778,5427.85 cw(c8848.15,5427.85) 8798.55,5477.45 ccw(c8848.15,5427.85) 8778,5427.85 ; 8887.52,5498 ccw(c8887.52,5427.85) 8837.92,5477.45 cw(c8887.52,5427.85) 8887.52,5498 ; 8887.52,5498 cw(c8887.52,5568.15) 8837.92,5518.55 ccw(c8887.52,5568.15) 8887.52,5498
  Mid-Layer 1 w12: v4(8152,4585) v4@8152,4586
  Bottom Layer w12: R153.1@8136,4471 8204,4471 8231,4444 v8(8231,4403) ; R154.1@8145.84,5043.28 8322.72,5043.28 v2(8334,5032)
VDD: C113.2 C119.2 C120.2 C179.2 L26.1 U34.15 U34.41 U34.65 U34.91 | length 1508.8
  Top Layer w40: v6(6723,5375) 6730,5382 L26.1@6944,5382
  Bottom Layer w12: C113.2@6220.98,4900.7 6222.08,4901.8 U34.41@6355.94,4901.8 6462.8,4901.8 v7(6463,4902) ; U34.65@6777.2,5204.94 6777.2,5284.8 6777,5285 6777.3,5285.3 C119.2@6777.3,5345.98 ; U34.15@6802.8,4573.06 6802.8,4511.2 v7(6803,4511) 6803,4440.28 C120.2@6803.3,4439.98 ; U34.91@7224.06,4876.2 7383.92,4876.2 C179.2@7384.02,4876.3 ; v7@6798.76,4506.76 cw(c6788.51,4496.51) 6803,4496.51 ; v7@6798.76,4506.76 cw(c6788.51,4496.51) 6803,4496.51 ; v7@6798.76,4506.76 cw(c6788.51,4496.51) 6803,4496.51 ; v7@6798.76,4515.24 ccw(c6789.01,4524.99) 6802.8,4524.99 ; v7@6798.76,4515.24 ccw(c6789.01,4524.99) 6802.8,4524.99 ; v7@6798.76,4515.24 ccw(c6789.01,4524.99) 6802.8,4524.99 ; 6802.8,4525.98 ccw(c6817.98,4525.98) v7@6807.24,4515.24 ; 6802.8,4525.98 ccw(c6817.98,4525.98) v7@6807.24,4515.24 ; 6802.8,4525.98 ccw(c6817.98,4525.98) v7@6807.24,4515.24 ; 6803,4496.51 cw(c6817.49,4496.51) v7@6807.24,4506.76 ; 6803,4496.51 cw(c6817.49,4496.51) v7@6807.24,4506.76 ; 6803,4496.51 cw(c6817.49,4496.51) v7@6807.24,4506.76 ; C113.2@6224.81,4897.87 cw(c6234.29,4888.4) 6234.29,4901.8 ccw(c6234.29,4888.4) C113.2@6224.81,4897.87 ; 6448.02,4901.8 ccw(c6448.02,4916.98) 6458.76,4906.24 cw(c6448.02,4916.98) 6448.02,4901.8 ; 6449.01,4901.8 cw(c6449.01,4888.01) 6458.76,4897.76 ccw(c6449.01,4888.01) 6449.01,4901.8 ; C119.2@6773.47,5342.15 cw(c6764.23,5332.91) 6777.3,5332.91 ccw(c6764.23,5332.91) C119.2@6773.47,5342.15 ; 6803,4451.37 ccw(c6813.68,4451.37) 6806.13,4443.81 cw(c6813.68,4451.37) 6803,4451.37
  Bottom Layer w15: v3(7124,4820) 7124,4850 7150.2,4876.2 U34.91@7224.06,4876.2 ; v3@7118.7,4825.3 ccw(c7105.89,4838.11) 7124,4838.11 ; v3@7118.7,4825.3 ccw(c7105.89,4838.11) 7124,4838.11 ; v3@7118.7,4825.3 ccw(c7105.89,4838.11) 7124,4838.11 ; 7124,4838.11 ccw(c7142.11,4838.11) v3@7129.3,4825.3 ; 7124,4838.11 ccw(c7142.11,4838.11) v3@7129.3,4825.3 ; 7124,4838.11 ccw(c7142.11,4838.11) v3@7129.3,4825.3
  Bottom Layer w20: v6(6723,5375) 6752.02,5345.98 C119.2@6776.3,5345.98 ; 6740.07,5357.93 cw(c6757.14,5375) 6733,5375 ccw(c6757.14,5375) 6740.07,5357.93 ; 6740.07,5357.93 ccw(c6723,5340.86) 6723,5365 cw(c6723,5340.86) 6740.07,5357.93
VDDQ: C114.2 C115.2 C117.2 C118.2 C127.2 C138.2 C152.2 C159.2 L22.1 U34.4 U34.11 U34.20 U34.27 U34.54 U34.61 U34.70 U34.77 | length 2360.6
  Top Layer w50: v2(6203,5164) L22.1@6203,5252
  Bottom Layer w12: C115.2@6457.3,4390.98 6457.3,4441.7 v7(6457,4442) 6495.71,4480.71 U34.27@6495.71,4573.06 ; C114.2@6495.3,5345.98 6496,5345.28 v7(6496,5283) 6495.71,5282.71 U34.54@6495.71,5204.94 ; U34.20@6674.84,4573.06 6674.84,4485.16 v7(6714,4446) 6713.7,4445.7 C118.2@6713.7,4397.02 ; U34.61@6674.84,5204.94 6674.84,5282.84 v7(6675,5283) C117.2@6675,5344.68 ; U34.11@6905.16,4573.06 6905.16,4511.84 v1(6906,4511) 6906.3,4510.7 C127.2@6906.3,4439.98 ; U34.70@6905.16,5204.94 6905.16,5271.16 v7(6917,5283) 6917,5345.68 C138.2@6917.3,5345.98 ; v7(7084,4680) 7084.29,4679.71 U34.4@7084.29,4573.06 7084.29,4533.99 C159.2@7136.3,4481.98 ; U34.77@7084.29,5204.94 v7(7084.29,5284.71) C152.2@7084.3,5345.98 ; v7@6452.76,4437.76 cw(c6441.79,4426.79) 6457.3,4426.79 ; v7@6452.76,4437.76 cw(c6441.79,4426.79) 6457.3,4426.79 ; v7@6452.76,4437.76 cw(c6441.79,4426.79) 6457.3,4426.79 ; v7@6457,4448 ccw(c6457,4462.49) 6467.24,4452.24 ; v7@6457,4448 ccw(c6457,4462.49) 6467.24,4452.24 ; v7@6457,4448 ccw(c6457,4462.49) 6467.24,4452.24 ; 6457.3,4428.24 cw(c6470.76,4428.24) v7@6461.24,4437.76 ; 6457.3,4428.24 cw(c6470.76,4428.24) v7@6461.24,4437.76 ; 6457.3,4428.24 cw(c6470.76,4428.24) v7@6461.24,4437.76 ; v7@6463,4442 cw(c6477.49,4442) 6467.24,4452.24 ; v7@6463,4442 cw(c6477.49,4442) 6467.24,4452.24 ; v7@6463,4442 cw(c6477.49,4442) 6467.24,4452.24 ; 6496,5297.49 cw(c6481.51,5297.49) 6491.76,5287.24 ccw(c6481.51,5297.49) 6496,5297.49 ; 6496,5297.49 ccw(c6510.49,5297.49) 6500.24,5287.24 cw(c6510.49,5297.49) 6496,5297.49 ; 6675,5297.49 cw(c6660.51,5297.49) 6670.76,5287.24 ccw(c6660.51,5297.49) 6675,5297.49 ; 6675,5297.49 ccw(c6689.49,5297.49) 6679.24,5287.24 cw(c6689.49,5297.49) 6675,5297.49 ; 6703.76,4456.24 cw(c6693.51,4446) v7@6708,4446 ; 6703.76,4456.24 ccw(c6714,4466.49) v7@6714,4452 ; 6703.76,4456.24 cw(c6693.51,4446) v7@6708,4446 ; 6703.76,4456.24 ccw(c6714,4466.49) v7@6714,4452 ; 6703.76,4456.24 ccw(c6714,4466.49) v7@6714,4452 ; 6703.76,4456.24 cw(c6693.51,4446) v7@6708,4446 ; v7@6709.76,4441.76 cw(c6700.24,4432.24) 6713.7,4432.24 ; v7@6709.76,4441.76 cw(c6700.24,4432.24) 6713.7,4432.24 ; v7@6709.76,4441.76 cw(c6700.24,4432.24) 6713.7,4432.24 ; 6713.7,4430.79 cw(c6729.21,4430.79) v7@6718.24,4441.76 ; 6713.7,4430.79 cw(c6729.21,4430.79) v7@6718.24,4441.76 ; 6713.7,4430.79 cw(c6729.21,4430.79) v7@6718.24,4441.76 ; v1@6903.28,4508.28 cw(c6896,4501) 6906.3,4501 ; v1@6903.28,4508.28 cw(c6896,4501) 6906.3,4501 ; v1@6903.28,4508.28 cw(c6896,4501) 6906.3,4501 ; 6905.16,4522.31 ccw(c6917.31,4522.31) v1@6908.72,4513.72 ; 6905.16,4522.31 ccw(c6917.31,4522.31) v1@6908.72,4513.72 ; 6905.16,4522.31 ccw(c6917.31,4522.31) v1@6908.72,4513.72 ; v7@6912.76,5287.24 ccw(c6931.1,5268.9) 6905.16,5268.9 cw(c6931.1,5268.9) v7@6912.76,5287.24 ; v7@6912.76,5287.24 ccw(c6902.51,5297.49) 6917,5297.49 ; v7@6912.76,5287.24 ccw(c6902.51,5297.49) 6917,5297.49 ; 6917,5297.49 ccw(c6931.49,5297.49) 6921.24,5287.24 cw(c6931.49,5297.49) 6917,5297.49 ; v7@7079.76,4675.76 cw(c7068.81,4664.81) 7084.29,4664.81 ; v7@7079.76,4675.76 cw(c7068.81,4664.81) 7084.29,4664.81 ; v7@7079.76,4675.76 cw(c7068.81,4664.81) 7084.29,4664.81 ; 7084.29,4666.22 cw(c7097.78,4666.22) v7@7088.24,4675.76 ; 7084.29,4666.22 cw(c7097.78,4666.22) v7@7088.24,4675.76 ; 7084.29,4666.22 cw(c7097.78,4666.22) v7@7088.24,4675.76 ; 7084.29,5270.22 cw(c7098.78,5270.22) 7088.53,5280.47 ccw(c7098.78,5270.22) 7084.29,5270.22 ; 7084.29,5270.22 ccw(c7069.81,5270.22) 7080.05,5280.47 cw(c7069.81,5270.22) 7084.29,5270.22 ; 7084.29,5299.19 cw(c7069.81,5299.19) 7080.05,5288.95 ccw(c7069.81,5299.19) 7084.29,5299.19 ; 7084.29,5299.19 ccw(c7098.78,5299.19) 7088.53,5288.95 cw(c7098.78,5299.19) 7084.29,5299.19 ; v7@6491.76,5278.76 cw(c6482.22,5269.22) 6495.71,5269.22 ccw(c6482.22,5269.22) v7@6491.76,5278.76 ; C114.2@6492.47,5342.15 cw(c6483.96,5333.64) 6496,5333.64 ccw(c6483.96,5333.64) C114.2@6492.47,5342.15 ; 6495.71,5267.81 cw(c6511.19,5267.81) 6500.24,5278.76 ccw(c6511.19,5267.81) 6495.71,5267.81 ; v7@6670.76,5278.76 cw(c6660.9,5268.9) 6674.84,5268.9 ccw(c6660.9,5268.9) v7@6670.76,5278.76 ; 6674.84,5268.13 cw(c6689.87,5268.13) 6679.24,5278.76 ccw(c6689.87,5268.13) 6674.84,5268.13 ; 6675,5332.67 cw(c6687.04,5332.67) 6678.53,5341.19 ccw(c6687.04,5332.67) 6675,5332.67 ; 6905.16,5239.92 cw(c6960.08,5239.92) 6921.24,5278.76 ccw(c6960.08,5239.92) 6905.16,5239.92 ; 6917,5334.6 cw(c6927.68,5334.6) 6920.13,5342.15 ccw(c6927.68,5334.6) 6917,5334.6 ; U34.4@7085.18,4545.5 ccw(c7115.1,4545.5) 7093.94,4524.34 cw(c7115.1,4545.5) U34.4@7085.18,4545.5 ; C159.2@7127.77,4490.52 ccw(c7136.3,4499.05) 7136.3,4486.98 cw(c7136.3,4499.05) C159.2@7127.77,4490.52
VIN+: C51.1 C52.1 L24.2 U23.30 | length 789.4
  Top Layer w10: 7093,2535 7112,2535 7136.61,2559.61 U23.30@7136.61,2624
  Top Layer w15: C52.1@6778,2582 C52.1@6779,2582
  Top Layer w23.62: L24.2@6660,2582 6756,2582 ; C52.1@6778,2582 C52.1@6779,2583 ; C51.1@6779,2684 C52.1@6779,2583 ; 7093,2535 6924,2535 6876,2583 C52.1@6779,2583 ; 6703.91,2582 ccw(c6703.91,2538.09) 6672.86,2569.14 cw(c6703.91,2538.09) 6703.91,2582 ; 6703.91,2582 cw(c6703.91,2625.91) 6672.86,2594.86 ccw(c6703.91,2625.91) 6703.91,2582
VIN-: C52.2 C53.2 L25.2 U23.31 | length 841.3
  Top Layer w10: 7114.7,2508 7114.7,2511.54 7155.06,2551.9 7155.06,2622.85 U23.31@7156.21,2624
  Top Layer w23.62: L25.2@6660,2423 C53.2@6779,2423 C52.2@6779,2528 6875,2528 6897.62,2505.38 7112.08,2505.38 7114.7,2508 ; 6703.91,2423 ccw(c6703.91,2379.09) 6672.86,2410.14 cw(c6703.91,2379.09) 6703.91,2423 ; 6703.91,2423 cw(c6703.91,2466.91) 6672.86,2435.86 ccw(c6703.91,2466.91) 6703.91,2423
VREF: C48.1 C50.1 R146.2 U23.26 | length 2368.4
  Top Layer w7: 7048.69,2596 7049,2596 7057.81,2604.81 U23.26@7057.81,2624 ; U23.26@7055.83,2614.17 cw(c7051.05,2609.39) 7057.81,2609.39 cw(c7064.57,2609.39) U23.26@7059.79,2614.17
  Top Layer w10: C48.1@6916.81,2635.81 cw(c6894.62,2613.62) 6926,2613.62 cw(c6957.38,2613.62) C48.1@6935.19,2635.81 ; C48.1@6926,2629.89 cw(c6941.1,2629.89) C48.1@6930.42,2640.58 ; C48.1@6926,2645 6926,2608 6967,2567 7018,2567 7027,2576 7027,2591 7032.31,2596.31 7048.69,2596.31
  Top Layer w20: R146.2@5969.34,3570.34 cw(c5955.69,3556.69) 5975,3556.69 cw(c5994.31,3556.69) R146.2@5980.66,3570.34 ; v1(5975,3517) R146.2@5975,3577
  Mid-Layer 1 w20: v1(5975,3517) 5975,3293 6043,3225 6043,2887 6144,2786 6461,2786 6604,2643 6926,2643 v1(6927,2644)
  Bottom Layer w10: v1@6923.58,2640.58 cw(c6915.31,2632.31) 6927,2632.31 cw(c6938.69,2632.31) v1@6930.42,2640.58 ; 6927,2573.04 ccw(c6985.04,2573.04) C50.1@6944,2532 ; 6927,2597.18 ccw(c7009.18,2597.18) C50.1@6951.07,2539.07 ; 6927,2621.33 ccw(c7033.33,2621.33) C50.1@6958.14,2546.14 ; v1(6927,2644) 6927,2554 C50.1@6949,2532
W#: U22.B2 U34.88 | length 1355.6
  Top Layer w15: U22.B2@7506.63,4016.63 v1(7526.32,4036.32)
  Mid-Layer 2 w7: v12(7287,4954) 7287,4953 7369,4953 7506.97,4815.03 7506.97,4055.66 v1(7526.32,4036.32) ; 7515.49,4047.14 cw(c7504.66,4036.32) v1@7519.97,4036.32 ; 7515.49,4047.14 ccw(c7526.32,4057.97) v1@7526.32,4042.66 ; 7515.49,4047.14 cw(c7504.66,4036.32) v1@7519.97,4036.32 ; 7515.49,4047.14 ccw(c7526.32,4057.97) v1@7526.32,4042.66 ; 7515.49,4047.14 ccw(c7526.32,4057.97) v1@7526.32,4042.66 ; 7515.49,4047.14 cw(c7504.66,4036.32) v1@7519.97,4036.32 ; v12@7292.88,4948.12 cw(c7304.65,4936.35) 7304.65,4953 ccw(c7304.65,4936.35) v12@7292.88,4948.12 ; v12@7292.88,4959.88 ccw(c7309.48,4976.48) 7309.48,4953 cw(c7309.48,4976.48) v12@7292.88,4959.88
  Bottom Layer w10: U34.88@7224.06,4952.98 7225.08,4954 v12(7287,4954) ; 7270.56,4954 cw(c7270.56,4937.56) 7282.18,4949.18 ccw(c7270.56,4937.56) 7270.56,4954 ; 7270.56,4954 ccw(c7270.56,4970.44) 7282.18,4958.82 cw(c7270.56,4970.44) 7270.56,4954 ; U34.88@7252.95,4951.64 cw(c7258.65,4945.94) 7258.65,4954 ccw(c7258.65,4945.94) U34.88@7252.95,4951.64
WDI: R150.1 R157.2 U22.AB2 | length 1054.4
  Top Layer w10: R157.2@5873,4095.5 5952.5,4095.5 6004,4044 6420,4044 6483,3981 6644.23,3981 6681.01,4017.79 6718.07,4017.79 U22.AB2@6719.23,4016.63 ; R157.2@5883.61,4084.89 cw(c5909.21,4059.29) 5909.21,4095.5 cw(c5909.21,4131.71) R157.2@5883.61,4106.11 ; 5916.14,4095.5 cw(c5916.14,4062.82) R150.1@5939.24,4085.93 ; 5928.21,4095.5 ccw(c5928.21,4111.11) R150.1@5939.24,4100.07 ; R150.1@5955.69,4083 cw(c5955.69,4060.51) 5971.59,4076.41 ; R150.1@5965.68,4093 ccw(c5991.48,4093) 5973.24,4074.76 ; 6704.74,4017.79 cw(c6704.74,4002.14) U22.AB2@6715.8,4013.21
ZZ: U22.H1 U34.64 | length 1756.7
  Top Layer w15: U22.H1@7270.41,4056 v1(7290.1,4075.69)
  Mid-Layer 1 w7: v1(6751,5308) 6751,5148.64 6835,5064.64 6835,5003.77 7309,4529.77 7309,4131.23 7292,4114.23 v1@7292,4077.59 ; 6751,5292.69 cw(c6766.31,5292.69) 6755.48,5303.52 ccw(c6766.31,5292.69) 6751,5292.69 ; 6751,5292.69 ccw(c6735.69,5292.69) 6746.52,5303.52 cw(c6735.69,5292.69) 6751,5292.69 ; v1@7285.61,4080.17 ccw(c7270.19,4095.59) 7292,4095.59 ; v1@7285.61,4080.17 ccw(c7270.19,4095.59) 7292,4095.59 ; v1@7285.61,4080.17 ccw(c7270.19,4095.59) 7292,4095.59 ; 7292,4086.4 ccw(c7300.81,4086.4) v1@7294.58,4080.17 ; 7292,4086.4 ccw(c7300.81,4086.4) v1@7294.58,4080.17 ; 7292,4086.4 ccw(c7300.81,4086.4) v1@7294.58,4080.17
  Bottom Layer w10: v1(6751,5308) 6751.61,5307.39 U34.64@6751.61,5204.94 ; v1@6747.58,5304.58 cw(c6737.83,5294.83) 6751.61,5294.83 ccw(c6737.83,5294.83) v1@6747.58,5304.58 ; 6751.61,5297.79 cw(c6761.21,5297.79) 6754.42,5304.58 ccw(c6761.21,5297.79) 6751.61,5297.79
pads on no net: D19.3 D20.17 D20.18 D20.19 D20.22 D20.23 D20.24 D20.28 D20.29 D20.30 D20.31 D20.32 N1.7 N3.5 R151.2 R152.1 R155.1 RN1.2 RN2.2 SW1.0 SW2.0 T1.2 U2.1 U2.5 U3.3 U3.4 U3.9 U7.1 U7.5 U8.14 U12.1 U12.5 U12.8 U13.1 U13.3 U13.7 U13.8 U14.3 U14.4 U14.5 U14.6 U14.11 U14.12 U14.13 U14.14 U16.1 U16.5 U20.7 U21.1 U21.2 U21.10 U21.11 U21.12 U21.13 U21.14 U21.15 U21.16 U21.17 U21.18 U21.19 U21.20 U21.21 U21.22 U21.23 U21.24 U21.27 U21.28 U22.A7 U22.A15 U22.AA12 U22.AB12 U22.B20 U22.C7 U22.C19 U22.D17 U22.F16 U22.G16 U22.G17 U22.J17 U22.K19 U22.K20 U22.K22 U22.P21 U22.R20 U22.T21 U22.U20 U22.U22 U23.36 U23.43 U24.6 U24.27 U24.28 U25.3 U25.4 U25.20 U26.3 U26.4 U26.20 U31.1 U31.5 U32.1 U32.5 U33.1 U33.5 U34.1 U34.2 U34.3 U34.6 U34.7 U34.16 U34.25 U34.28 U34.29 U34.30 U34.38 U34.39 U34.42 U34.43 U34.51 U34.52 U34.53 U34.56 U34.57 U34.66 U34.75 U34.78 U34.79 U34.84 U34.95 U34.96 U38.1 X1.1
copper on no net:
  other v1: 7486.95,3839.47
  other v2: 9737,4388 9734,4506
  other v11: 6064.76,4269.76 6112,4269.76 6159.24,4269.76 6064.76,4317 6112,4317 6159.24,4317 6064.76,4364.24 6112,4364.24 6159.24,4364.24

## Polygon pours and split planes (outlines as drawn)
GND on GND (split plane): 193 vertices, not listed, extent 4530.56,1909.86 9803.9,5790.93
AGND on GND (split plane): 203 vertices, not listed, extent 3849.1,1909.86 7825.44,5790.93
VCC3V3 on VCC (split plane): 238 vertices, not listed, extent 4639,1909.86 9803.9,5609.44
AVCC5V on VCC (split plane): 7997.44,5385.56 7740.13,5385.56 7620.35,5505.35 7618.78,5506.55 7618.03,5506.86 7616.96,5507.31 7615,5507.56 7419.13,5507.56 7304.35,5622.35 7302.78,5623.55 7302.03,5623.86 7300.96,5624.31 7299,5624.56 6228,5624.56 6226.04,5624.31 6224.22,5623.55 6222.65,5622.35 6022.65,5422.35 5843.65,5243.35 5842.45,5241.78 5842.14,5241.03 5841.69,5239.96 5841.44,5238 5841.44,4945.13 5639.65,4743.35 5638.45,4741.78 5638.14,4741.03 5637.69,4739.96 5637.44,4738 5637.44,4343.56 5411.13,4343.56 5110.56,4644.13 5110.56,5031 5110.56,5349 5110.31,5350.96 5109.55,5352.78 5108.35,5354.35 5106.78,5355.55 5104.96,5356.31 5103,5356.56 4395,5356.56 4393.04,5356.31 4391.22,5355.55 4389.65,5354.35 4388.45,5352.78 4387.69,5350.96 4387.44,5349 4387.44,3661 4387.69,3659.04 4388.45,3657.22 4389.65,3655.65 4391.22,3654.45 4393.04,3653.69 4395,3653.44 5115.87,3653.44 5155.44,3613.87 5155.44,3400.13 5049.87,3294.56 4438,3294.56 4436.04,3294.31 4434.22,3293.55 4432.65,3292.35 4431.45,3290.78 4430.69,3288.96 4430.44,3287 4430.44,2623 4430.69,2621.04 4431.45,2619.22 4432.65,2617.65 4434.22,2616.45 4436.04,2615.69 4438,2615.44 6246.44,2615.44 6246.44,2521 6246.44,2398 6246.44,2348.56 4424,2348.56 4422.04,2348.31 4420.22,2347.55 4418.65,2346.35 4417.45,2344.78 4417.14,2344.03 4416.69,2342.96 4416.44,2341 4416.44,2090 4416.69,2088.04 4417.45,2086.22 4418.65,2084.65 4420.22,2083.45 4422.04,2082.69 4424,2082.44 6604,2082.44 6605.96,2082.69 6607.78,2083.45 6609.35,2084.65 6610.55,2086.22 6611.31,2088.04 6611.56,2090 6611.31,2091.96 6610.56,2093.75 6610.56,2201.44 7531.44,2201.44 7531.44,2090 7531.69,2088.04 7532.44,2086.25 7532.44,1909.86 4086,1909.86 4086,2070 3849.1,2070 3849.1,5630.79 4086,5630.79 4086,5790.93 7997.44,5790.93
A-5V on VCC (split plane): 5095.44,5031 5095.44,4648.56 4677,4648.56 4675.04,4648.31 4673.22,4647.55 4671.65,4646.35 4670.45,4644.78 4669.69,4642.96 4669.44,4641 4669.44,4090 4669.69,4088.04 4670.45,4086.22 4671.65,4084.65 4673.22,4083.45 4675.04,4082.69 4677,4082.44 5302.87,4082.44 5518.44,3866.87 5518.44,3336.13 5263.87,3081.56 4631.44,3081.56 4629.48,3081.31 4627.65,3080.55 4626.09,3079.35 4624.88,3077.78 4624.13,3075.96 4623.87,3074 4623.87,2898.44 4623.87,2875 4624.13,2873.04 4624.88,2871.22 4626.09,2869.65 4627.65,2868.45 4629.48,2867.69 4631.44,2867.44 5707,2867.44 5708.96,2867.69 5710.78,2868.45 5712.35,2869.65 5713.55,2871.22 5714.31,2873.04 5714.56,2875 5714.56,3260.17 5746.83,3292.44 5997.87,3292.44 6269.44,3020.87 6269.44,2973 6269.44,2855 6269.44,2839 6269.44,2761 6269.69,2759.04 6270.45,2757.22 6271.65,2755.65 6273.22,2754.45 6275.04,2753.69 6277,2753.44 6463,2753.44 6464.96,2753.69 6466.78,2754.45 6467.56,2755.04 6596.11,2755.04 6596.45,2754.22 6597.04,2753.44 6597.04,2625.56 6596.45,2624.78 6595.69,2622.96 6595.44,2621 6595.44,2097.56 4431.56,2097.56 4431.56,2333.44 6255,2333.44 6256.73,2333.66 6256.96,2333.69 6258.78,2334.45 6260.35,2335.65 6261.55,2337.22 6262.31,2339.04 6262.34,2339.27 6262.56,2341 6262.34,2342.73 6262.31,2342.96 6261.56,2344.75 6261.56,2622 6261.34,2623.73 6261.31,2623.96 6260.55,2625.78 6259.35,2627.35 6258.35,2628.35 6256.78,2629.55 6256.03,2629.86 6254.96,2630.31 6253,2630.56 4445.56,2630.56 4445.56,3279.44 5053,3279.44 5054.96,3279.69 5056.03,3280.14 5056.78,3280.45 5058.35,3281.65 5168.35,3391.65 5169.55,3393.22 5170.31,3395.04 5170.56,3397 5170.56,3617 5170.31,3618.96 5169.86,3620.03 5169.55,3620.78 5168.35,3622.35 5124.35,3666.35 5122.78,3667.55 5122.03,3667.86 5120.96,3668.31 5119,3668.56 4402.56,3668.56 4402.56,5341.44 5095.44,5341.44
VCC5V on VCC (split plane): 8989.44,5002 8989.69,5000.04 8990.14,4998.97 8990.45,4998.22 8991.65,4996.65 9030.65,4957.65 9032.22,4956.45 9034.04,4955.69 9036,4955.44 9282.44,4955.44 9282.44,2573 9282.44,2509 9282.44,2304 9282.44,2292 9282.44,2157.13 9259.87,2134.56 9037.13,2134.56 9012.56,2159.13 9012.56,2352.87 9044.35,2384.65 9045.55,2386.22 9046.31,2388.04 9046.56,2390 9046.56,2414 9046.56,3343 9046.31,3344.96 9045.86,3346.03 9045.55,3346.78 9044.35,3348.35 8872.56,3520.13 8872.56,3709.44 9052,3709.44 9053.96,3709.69 9055.78,3710.45 9057.35,3711.65 9058.55,3713.22 9059.31,3715.04 9059.56,3717 9059.56,4734 9059.31,4735.96 9058.55,4737.78 9057.35,4739.35 9055.35,4741.35 9053.78,4742.55 9053.03,4742.86 9051.96,4743.31 9050,4743.56 8419,4743.56 8417.04,4743.31 8415.22,4742.55 8413.65,4741.35 8412.45,4739.78 8411.69,4737.96 8411.44,4736 8411.44,4373.56 8111.56,4373.56 8111.56,5248 8111.31,5249.96 8110.86,5251.03 8110.55,5251.78 8109.35,5253.35 8024.56,5338.13 8024.56,5790.93 8989.44,5790.93
BATT12V on VCC (split plane): 9567,5630 9789.91,5630 9789.91,4746.09 9313.09,4746.09 9313.09,4973 9312.74,4975.61 9311.74,4978.04 9310.13,4980.13 9308.13,4982.13 9306.04,4983.73 9303.61,4984.74 9301,4985.09 9046.18,4985.09 9022.09,5009.18 9022.09,5075 9022.09,5790.93 9567,5790.93
VDDQ on VCC (split plane): 7107.44,5463.87 7107.44,5219.56 6815.56,5219.56 6815.56,5433 6815.31,5434.96 6814.55,5436.78 6813.35,5438.35 6811.78,5439.55 6809.96,5440.31 6808,5440.56 6678,5440.56 6676.04,5440.31 6674.22,5439.55 6672.65,5438.35 6671.45,5436.78 6670.69,5434.96 6670.44,5433 6670.44,5357 6670.69,5355.04 6671.14,5353.97 6671.45,5353.22 6672.65,5351.65 6704.44,5319.87 6704.44,4992.13 6673.87,4961.56 6380,4961.56 6378.04,4961.31 6376.22,4960.55 6374.65,4959.35 6373.45,4957.78 6372.69,4955.96 6372.44,4954 6372.44,4854 6372.69,4852.04 6373.45,4850.22 6374.65,4848.65 6376.22,4847.45 6378.04,4846.69 6380,4846.44 6656.87,4846.44 6759.44,4743.87 6759.44,4478 6759.69,4476.04 6760.45,4474.22 6761.65,4472.65 6763.22,4471.45 6765.04,4470.69 6767,4470.44 6838,4470.44 6839.96,4470.69 6841.78,4471.45 6843.35,4472.65 6844.55,4474.22 6845.31,4476.04 6845.56,4478 6845.56,4734.87 6881.13,4770.44 7177.44,4770.44 7177.44,4597.56 7056,4597.56 7054.04,4597.31 7052.97,4596.86 7052.22,4596.55 7050.65,4595.35 6965.65,4510.35 6964.45,4508.78 6964.14,4508.03 6963.69,4506.96 6963.44,4505 6963.44,4390.56 6311.13,4390.56 6152.56,4549.13 6152.56,5280.44 6374,5280.44 6375.96,5280.69 6377.03,5281.14 6377.78,5281.45 6379.35,5282.65 6602.13,5505.44 7065.87,5505.44
DUTAVDD on VCC (split plane): 7213.44,2762 7213.69,2760.04 7214.45,2758.22 7215.65,2756.65 7217.22,2755.45 7219.04,2754.69 7221,2754.44 7310.44,2754.44 7310.44,2668 7310.69,2666.04 7311.45,2664.22 7312.65,2662.65 7314.22,2661.45 7316.04,2660.69 7318,2660.44 7531.44,2660.44 7531.44,2216.56 6610.56,2216.56 6610.56,2621 6610.31,2622.96 6609.55,2624.78 6608.96,2625.56 6608.96,2750.44 7072,2750.44 7073.96,2750.69 7075.78,2751.45 7077.35,2752.65 7078.55,2754.22 7079.31,2756.04 7079.56,2758 7079.56,2825.44 7213.44,2825.44